# EAGLE board Projeto IoT (EAGLE 9.7.0)

Size 194.43 x 139.6 mm. Coordinates in mm from the lower left corner, seen from the top.
Outline: 0,0 194.43,0 194.43,139.6 0,139.6 0,0
Copper layers (1*16): Top 0.035mm / dielectric 1.5mm / Bottom 0.035mm
Design rules "default": minimum track width 6mil, minimum drill 0.35mm, track to track 6mil, track to pad 6mil, pad to pad 6mil, via to via 6mil, smd to smd 6mil, copper to edge 40mil, drill to drill 6mil, minimum pad ring 10mil, minimum via ring 8mil, stop-mask expansion 4mil, vias tented up to drill 0mil, thermal gap 10mil

## Footprints (pad centres in the part's own frame; a part is rotated, then mirrored left to right if it is on the bottom)
LEDRD254W60D565H860B = drill 0.981 pad 1.581: 1 -1.27,0; 2 1.27,0
LEDRD254W60D565H860B_G = drill 0.981 pad 1.581: 1 -1.27,0; 2 1.27,0
PIEZO = drill 1 pad 1.6: 1 -3.5,0; 2 3.5,0
RESAD1016W63L850D250B = drill 0.83 pad 1.43: 1 -5.08,0; 2 5.08,0
GL5528 = drill 0.8 pad 1.4: 1 -1.702,0; 2 1.702,0
HA-06-SM065 = drill 1 pad 1.676: 1 -2.54,-2.54; 2 0,2.54; 3 2.54,-2.54
SWITCH-MOMENTARY-PTH-6.5MM = drill 1.016 pad 1.88: 1 -3.251,2.261; 2 3.251,2.261; 3 -3.251,-2.261; 4 3.251,-2.261
SG90 = drill 1.016 long: 1 -2.54,0; 2 0,0; 3 2.54,0
ARDUINO-UNO-R3-SHIELD = drill 1.016 pad 1.88: 3.3V 24.13,-2.54; 5V 24.13,0; A0 24.13,12.7; A1 24.13,15.24; A2 24.13,17.78; A3 24.13,20.32; A4 24.13,22.86; A5 24.13,25.4; AREF -24.13,-13.97; D2 -24.13,20.32; D3 -24.13,17.78; D4 -24.13,15.24; D5 -24.13,12.7; D6 -24.13,10.16; D7 -24.13,7.62; D8 -24.13,3.81; D9 -24.13,1.27; D10 -24.13,-1.27; D11 -24.13,-3.81; D12 -24.13,-6.35; D13 -24.13,-8.89; GND@0 24.13,2.54; GND@1 24.13,5.08; GND@2 -24.13,-11.43; IOREF 24.13,-7.62; NC 24.13,-10.16; RES 24.13,-5.08; RX -24.13,25.4; SCL -24.13,-19.05; SDA -24.13,-16.51; TX -24.13,22.86; VIN 24.13,7.62
JHD-162A = drill 1.016 long: 1 -19.05,0; 2 -16.51,0; 3 -13.97,0; 4 -11.43,0; 5 -8.89,0; 6 -6.35,0; 7 -3.81,0; 8 -1.27,0; 9 1.27,0; 10 3.81,0; 11 6.35,0; 12 8.89,0; 13 11.43,0; 14 13.97,0; 15 16.51,0; 16 19.05,0

## Placement (x,y rotation side)
D1  RED  [LEDRD254W60D565H860B]  136.59,74.72 180 top
D2  GREEN  [LEDRD254W60D565H860B_G]  141.67,74.72 180 top
PIEZO1  PIEZO  [PIEZO]  128.25,126.02 0 top
R1  1k  [RESAD1016W63L850D250B]  150.56,89.96 90 top
R2  1k  [RESAD1016W63L850D250B]  132.78,51.86 90 top
R3  1k  [RESAD1016W63L850D250B]  160.72,89.96 90 top
R4  1k  [RESAD1016W63L850D250B]  135.32,89.96 90 top
R5  1k  [RESAD1016W63L850D250B]  140.4,89.96 90 top
R6  PHOTOCELL_GL5528  [GL5528]  141.67,62.02 0 top
R7  1k  [RESAD1016W63L850D250B]  148.02,59.48 0 top
RPOT1  250k  [HA-06-SM065]  102.3,62.02 0 top
S1  SWITCH_MOMENTARY  [SWITCH-MOMENTARY-PTH-6.5MM]  158.18,70.91 90 top
SBOTÃO_INPUT  SWITCH_MOMENTARY  [SWITCH-MOMENTARY-PTH-6.5MM]  148.02,70.91 270 top
SERVO1  SERVOSG90  [SG90]  187.44,110.13 90 top
U1  ARDUINO-UNO-R3-SHIELD  [ARDUINO-UNO-R3-SHIELD]  47.88,78.34 270 top
U2  LCD-16X2JHD-162A  [JHD-162A]  116.4,36.63 0 top

## Library data of the parts
D1 = Tinkercad; CATEGORY: Opto-Electronic; SUB-CATEGORY: LED; VALUE: LED_RED
D2 = Tinkercad; CATEGORY: Opto-Electronic; SUB-CATEGORY: LED; VALUE: LED_GREEN
PIEZO1 R1-R7 RPOT1 S1 SBOTÃO_INPUT SERVO1 U1 U2 = Tinkercad

## Nets
D1_C: D1.2 R4.1
D2_C: D2.2 R5.1
S1_3: R3.1 S1.3 S1.4
SBOTÃO_INPUT_2: R1.1 SBOTÃO_INPUT.1 SBOTÃO_INPUT.2
U1_5V: R2.1 R7.2 RPOT1.3 SERVO1.2 U1.5V U2.2
U1_A0: R6.2 R7.1 U1.A0
U1_A1: U1.A1 U2.14
U1_D2: S1.1 S1.2 U1.D2
U1_D3: U1.D3 U2.13
U1_D4: U1.D4 U2.12
U1_D5: U1.D5 U2.11
U1_D7: SBOTÃO_INPUT.3 SBOTÃO_INPUT.4 U1.D7
U1_D8: PIEZO1.1 U1.D8
U1_D9: SERVO1.3 U1.D9
U1_D10: D2.1 U1.D10
U1_D11: U1.D11 U2.6
U1_D12: U1.D12 U2.4
U1_D13: D1.1 U1.D13
U1_GND: PIEZO1.2 R1.2 R3.2 R4.2 R5.2 R6.1 RPOT1.1 SERVO1.1 U1.GND@0 U1.GND@1 U1.GND@2 U2.1 U2.5 U2.16
U2_LED+: R2.2 U2.15
U2_VO: RPOT1.2 U2.3

## Tracks (layer width: path | path; a pad name or v marks a point on that pad's centre or on a via)
D1_C  (1 unrouted)
D2_C  (1 unrouted)
S1_3  (2 unrouted)
SBOTÃO_INPUT_2  (2 unrouted)
U1_5V  (5 unrouted)
U1_A0  (2 unrouted)
U1_A1  (1 unrouted)
U1_D2  (2 unrouted)
U1_D3  (1 unrouted)
U1_D4  (1 unrouted)
U1_D5  (1 unrouted)
U1_D7  (2 unrouted)
U1_D8  (1 unrouted)
U1_D9  (1 unrouted)
U1_D10  (1 unrouted)
U1_D11  (1 unrouted)
U1_D12  (1 unrouted)
U1_D13  (1 unrouted)
U1_GND  (13 unrouted)
U2_LED+  (1 unrouted)
U2_VO  (1 unrouted)